# Allegro board CARLA_PCB_MK5.brd
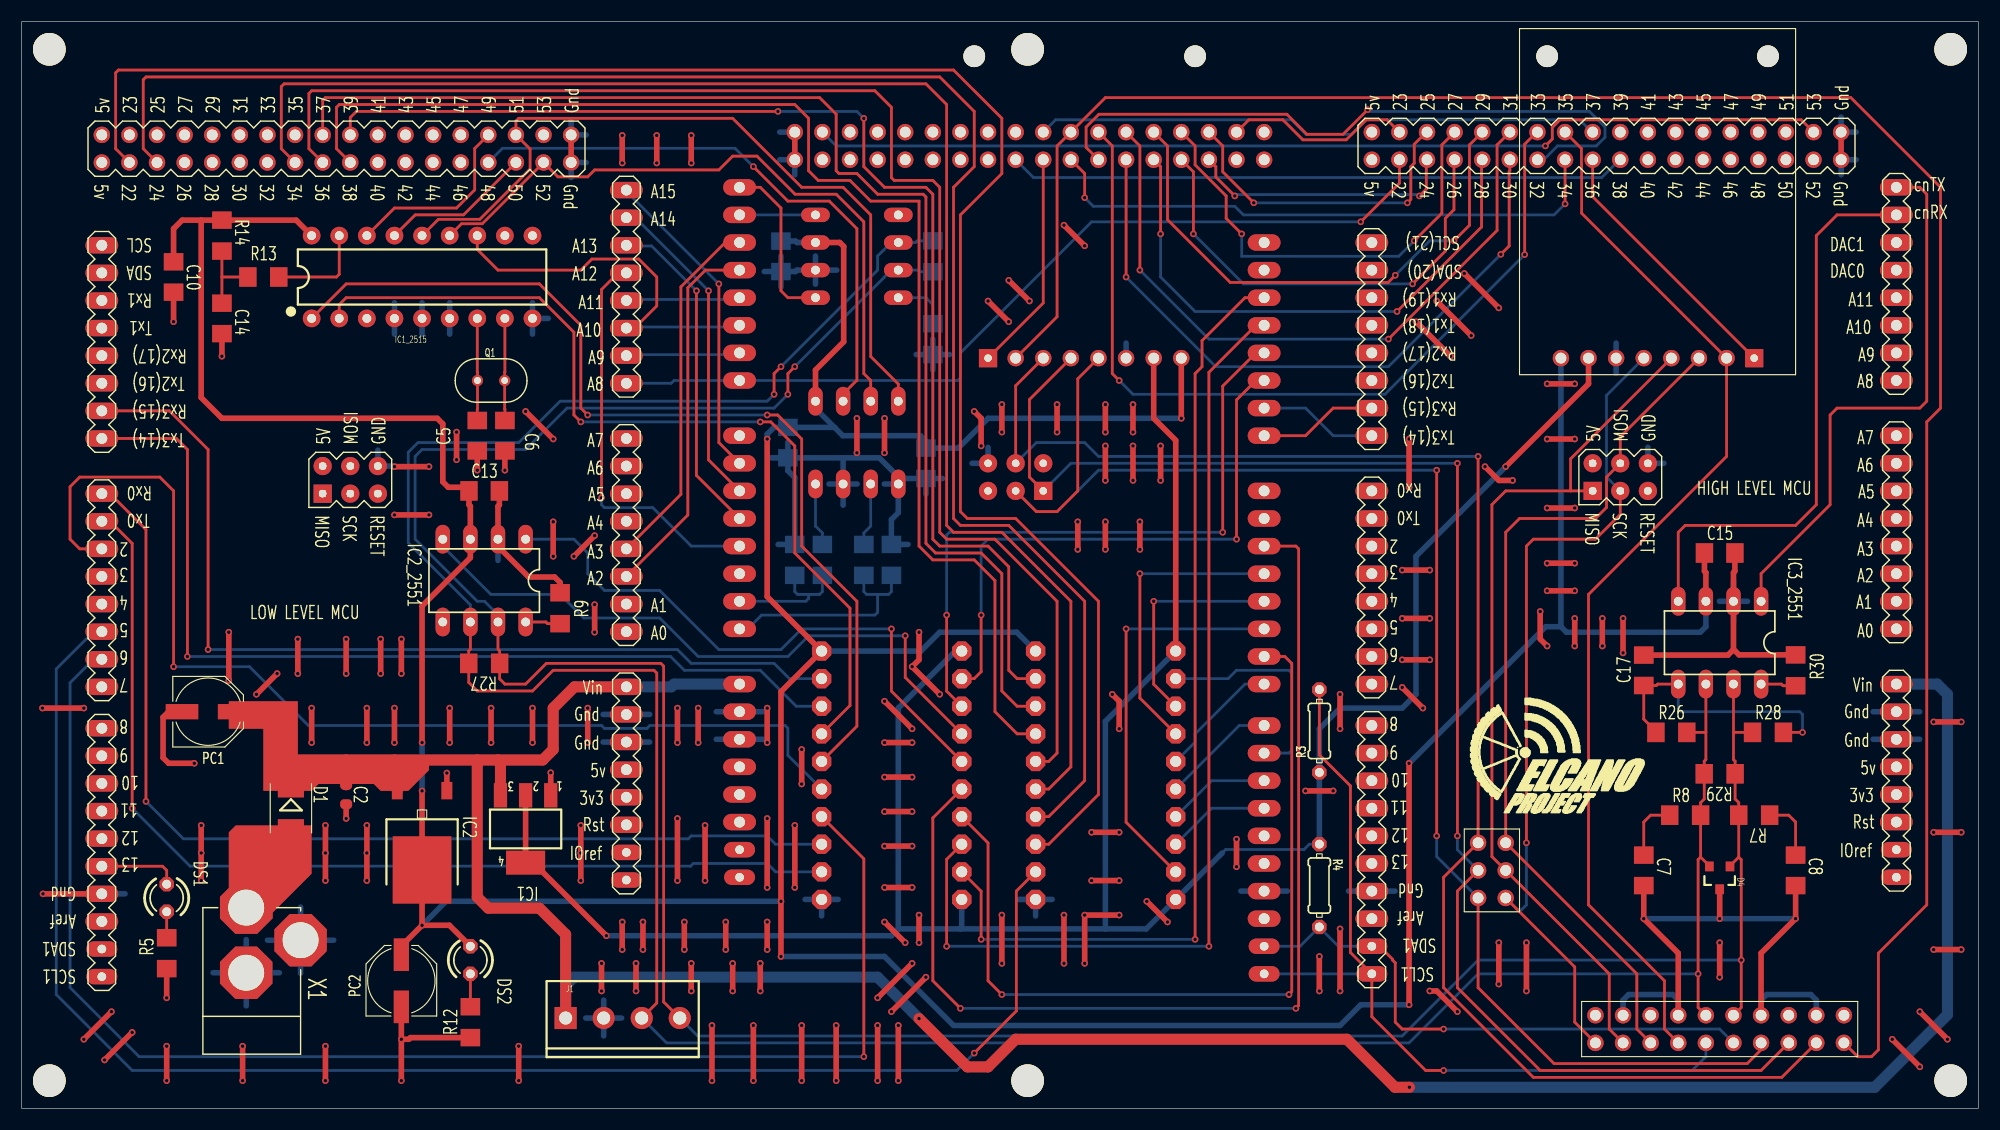
[diagram p0: board, top side]
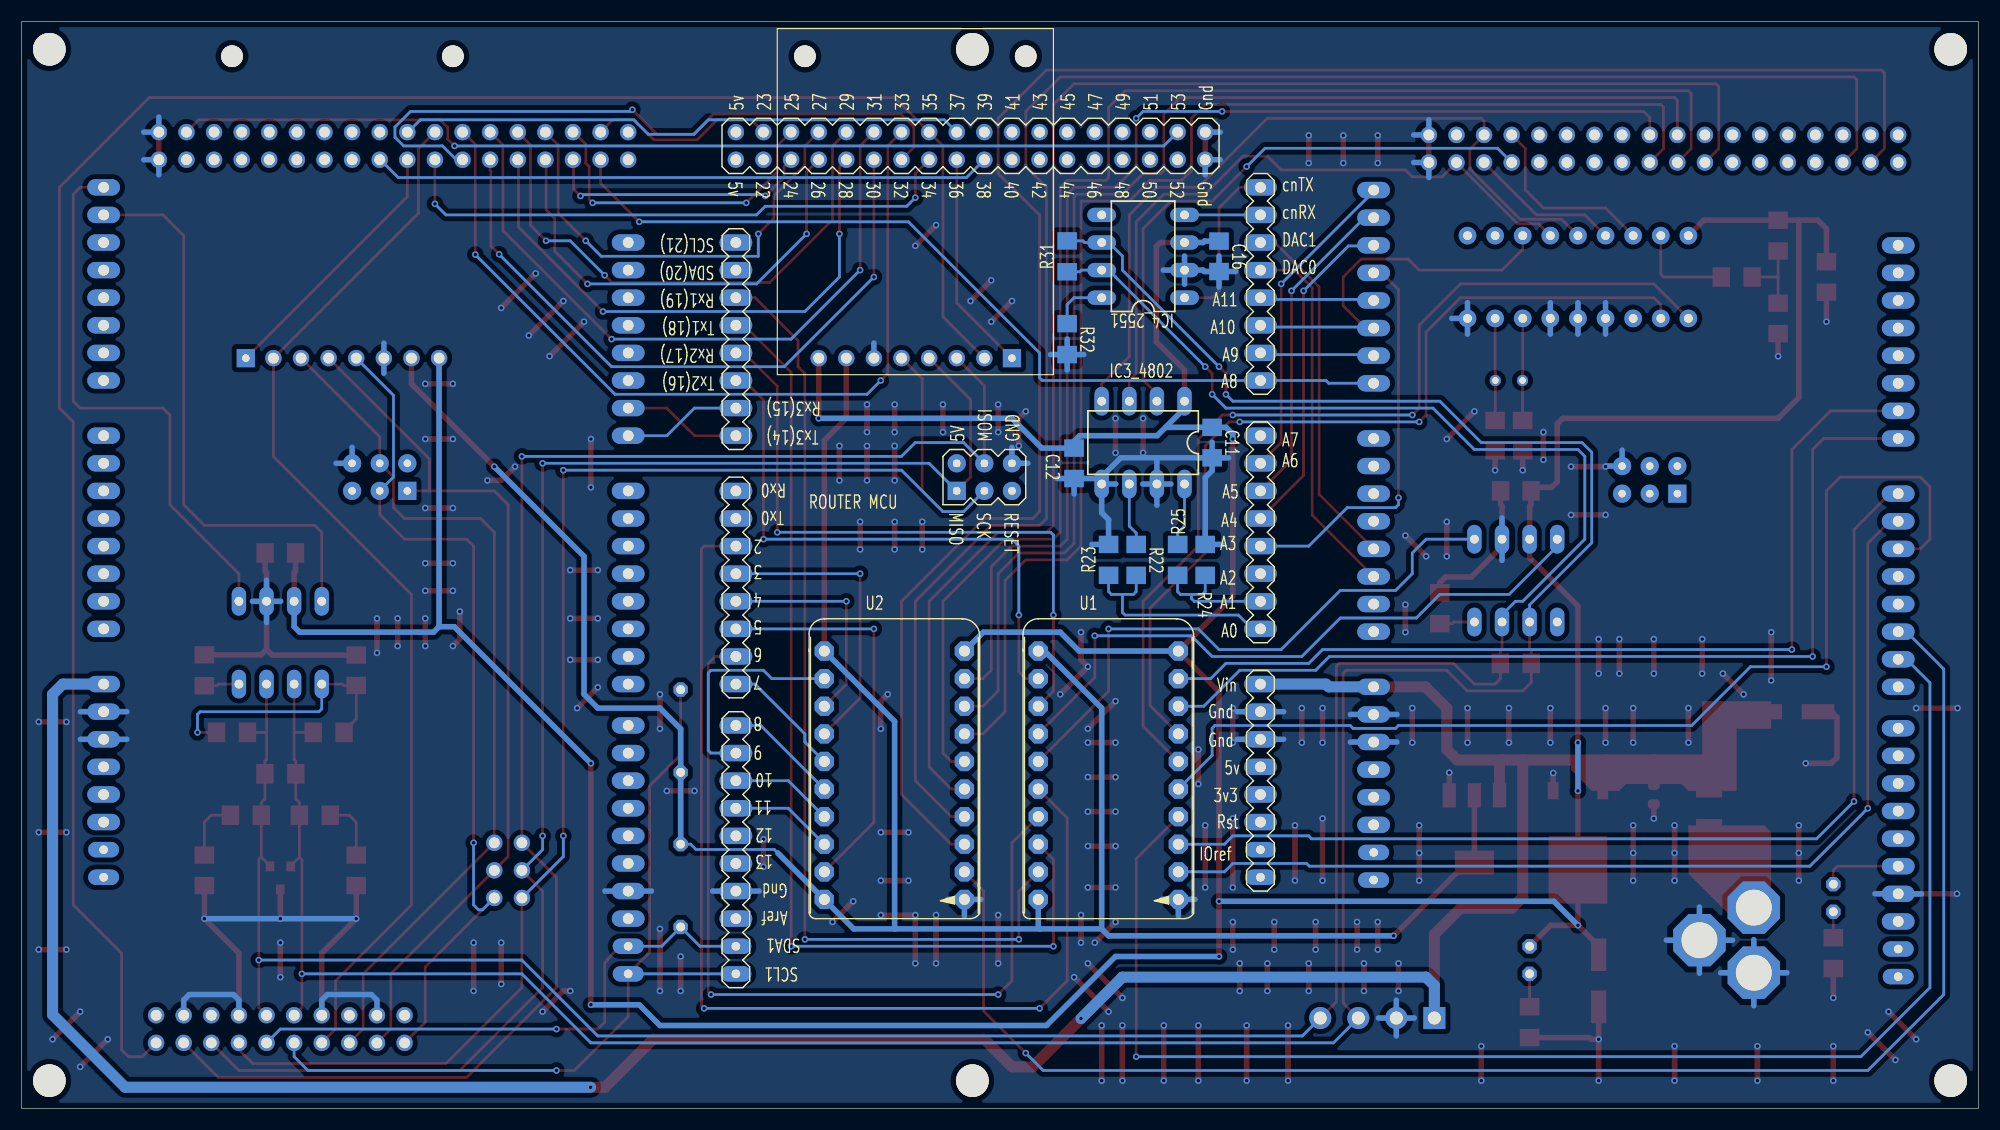
[diagram p1: board, bottom side, seen from below]

Outline 180 x 100 mm; copper layers: TOP, BOTTOM. Coordinates in mm from the lower left corner of the outline.
Outline path: 0,100 0,0 180,0 180,100 0,100

## Design rules (mm)
constraint set DEFAULT: min track width 0.254
net group OSCILLATOR: nets OSC1 OSC2
net group SPI_SIGNALS: nets CAN_SS DAC_SS
net group POWER: nets 12V0
nets with their own width: min track width 0.254; nets BRAKE_ON BRAKE_PWM BUZZER CAN_INT CAN_RXD CAN_TXD CANH CANL CS_C5_FRONT CS_C5_REAR CS_GYRO CS_MOUSE D_36 DACA DACB DEBUG_LED DRDY_C DRDY_G EBIKECONTRL EN ESTOP_INT FIX FWDSW GPS_RX GPS_TX HALLPHASEA HALLPHASEB HALLPHASEC I1 I2 INT1 L_SENSE LED LL_SCK MISO MOSI N00469 N35866 N35982 N35986 NPD PPS R_BRAKE_ON R_BRAKE_PWM R_BUZZER R_D_36 R_DACA R_DACB R_FWDSW R_REGEN_ACTIVE R_REVERSE R_RX1 R_RX3 R_SENSE R_STEER_PWM R_TX1 R_TX3 R_VOLTAGE_SWITCH R_WATCHDOG REGEN_ACTIVE REVERSE RS RX0 RX3 SCL1 SDA1 SPEEDOMETER SPI_SS STEER_SERVO_PWM TX0 TX3 VOLTAGE_SWITCH WATCHDOG WHEELROTATION

## Placement (name value [footprint] x y rotation side)
C2  100n  [C0603-ROUND]  29.84 28.88 270 top
C5  33pF  [C1206]  41.91 61.9 270 top
C6  33pF  [C1206]  44.45 61.9 270 top
C7  560pF  [C1206]  149.22 21.89 270 top
C8  560pF  [C1206]  163.19 21.89 270 top
C10  0.1uF  [C1206]  13.97 76.5 270 top
C11  0.1uF  [C1206]  70.48 61.27 270 bottom
C12  0.1uF  [C1206]  83.19 59.36 270 bottom
C13  0.1uF  [C1206]  42.55 56.82 0 top
C14  0.1uF  [C1206]  18.41 72.69 270 top
C15  0.1uF  [C1206]  156.21 51.1 0 top
C16  0.1uF  [C1206]  69.85 78.41 270 bottom
C17  4700pF  [C1206]  149.22 40.31 90 top
D1  M7  [SMB]  24.77 27.61 270 top
D4  PESD1CAN  [SPARKFUN-DISCRETESEMI_SOT23-3]  156.21 21.26 180 top
DS1  N_A  [LED3MM]  13.34 19.36 270 top
DS2  N_A  [LED3MM]  41.27 13.64 270 top
HIGH LEVEL MCU  -  [DUE_NORMAL_]  154.69 68.25 90 top
IC1  MC33269ST-3.3T3G  [SOT223]  46.35 25.7 180 top
IC1_2515  MCP2515  [DIP18]  36.83 76.5 0 top
IC2  MC33269DT-5.0G  [DPACK]  36.83 24.43 180 top
IC2_2551  MCP2551DIL08  [IC-PACKAGE_DIL08]  42.55 48.56 180 top
IC3_2551  MCP2551DIL08  [IC-PACKAGE_DIL08]  156.21 42.85 180 top
IC3_4802  MCP4802  [DIL08]  76.83 61.27 0 bottom
IC4_2551  MCP2551DIL08  [IC-PACKAGE_DIL08]  76.83 78.41 90 bottom
J1  N_A  [SCREWTERMINAL-3_5MM-4]  50.04 8.31 0 top
J2  PicoScope  [HDR-2X10]  156.21 7.29 90 top
JP2  PINHD-2X3  [HDR-2X3]  135.25 21.89 0 top
LOW LEVEL MCU  ADUMEGA2560  [MEGA2560]  37.85 68 90 top
NOREF  -  [unnamed]  2.54 2.54 0 top
NOREF#2  -  [unnamed]  177.46 2.54 0 top
NOREF#3  -  [unnamed]  2.54 97.46 0 top
NOREF#4  -  [unnamed]  92.54 2.54 0 top
NOREF#5  -  [unnamed]  177.46 97.46 0 top
NOREF#6  -  [unnamed]  92.54 97.46 0 top
PC1  47u  [PANASONIC_D]  17.14 36.5 0 top
PC2  47u  [PANASONIC_D]  34.92 11.73 90 top
Q1  16MHz  [XTAL_ECS-160-20-46X]  43.18 66.98 0 top
R3  4.7 k  [0204_7]  119.38 34.72 90 top
R4  4.7 k  [0204_7]  119.38 20.5 270 top
R5  1K  [R1206]  13.34 14.28 90 top
R7  100  [R1206]  159.38 26.98 180 top
R8  100  [R1206]  153.03 26.98 0 top
R9  4.7K  [R1206]  49.53 46.02 90 top
R12  1K  [R1206]  41.27 7.92 90 top
R13  1K  [R1206]  22.23 76.5 180 top
R14  20K  [R1206]  18.41 80.31 270 top
R22  2.2K  [R1206]  77.47 50.47 270 bottom
R23  3.3K  [R1206]  80.01 50.47 90 bottom
R24  2.2K  [R1206]  73.66 50.47 270 bottom
R25  3.3K  [R1206]  71.12 50.47 90 bottom
R26  60  [R1206]  151.76 34.59 0 top
R27  120  [R1206]  42.55 40.95 180 top
R28  60  [R1206]  160.66 34.59 0 top
R29  120  [R1206]  156.21 30.79 180 top
R30  4.7K  [R1206]  163.19 40.31 90 top
R31  120  [R1206]  83.82 78.41 90 bottom
R32  4.7K  [R1206]  83.82 70.79 270 bottom
ROUTER MCU  -  [DUE_NORMAL_]  83.82 68.25 90 bottom
SD1  Micro-SD-Breakout  [ADA-MICROSD]  150.5 99.36 270 top
SD2  Micro-SD-Breakout  [ADA-MICROSD]  97.79 99.36 270 bottom
U1  LLSHIFTER  [ELSHIFTER]  81.28 17.45 180 bottom
U2  LLSHIFTER  [ELSHIFTER]  100.97 17.45 180 bottom
X1  DC21MMX  [DC-21MM]  20.57 12.12 180 top

## Library data of the parts
C2 = C-EU_0603-RND
C5-C8 C10-C17 = C-US_C1206
D1 = DIODE-_SMB_0
D4 = PESD1CAN
DS1 DS2 = LED_3MM
HIGH LEVEL MCU ROUTER MCU = DUEPNORMALF_1
IC1 = MC33269STJ_1
IC1_2515 = MCP2515PMCP2510F_P_0
IC2 = MC33269KJ_D_1
IC2_2551 IC3_2551 IC4_2551 = MCP2551_DIL08_0
IC3_4802 = DIL8
J1 = CONN_04_SCREW_0
J2 = Header-2x10_2
JP2 = PINHD-2X3_0
LOW LEVEL MCU = ADUMEGA2560_4
PC1 PC2 = CPOL-EU_D_1
Q1 = ECS-160-20-46X
R3 R4 = R-US__0204B7
R5 R7-R9 R12-R14 R22-R32 = R-US__R1206
SD1 SD2 = Micro-SD-Breakout
U1 U2 = ELSHIFTER
X1 = DC21MM_0

## Footprints (pads in the part's own frame, mm; a bottom-side part is the same pattern mirrored in y, then rotated)
0204_7
  rrect 1.321x1.321 hole 0.813: 1(-3.81,0) 2(3.81,0)
ADA-MICROSD
  round 2 hole 2 unplated: (2.54,10.16) (2.54,-10.16)
  rect 1.676x1.676 hole 0.7: 1(30.326,8.89)
  round 1.508 hole 1: 2(30.326,6.35) 3(30.326,3.81) 4(30.326,1.27) 5(30.326,-1.27) 6(30.326,-3.81) 7(30.326,-6.35) 8(30.326,-8.89)
C0603-ROUND
  custom 0.898x1.1 smd: 1(-0.889,0) 2(0.889,0)
C1206
  rect 1.6x1.8 smd: 1(-1.4,0) 2(1.4,0)
DC-21MM
  rrect 4.826x4.826 hole 3.302: 1(-5.08,-3.353) 2(-0.076,-6.35) 3(-0.076,-0.356)
DIL08
  oval 1.321x2.642 hole 0.813: 1(-3.81,-3.81) 2(-1.27,-3.81) 3(1.27,-3.81) 4(3.81,-3.81) 5(3.81,3.81) 6(1.27,3.81) 7(-1.27,3.81) 8(-3.81,3.81)
DIP18
  round 1.626 hole 0.813: 1(-10.16,-3.81) 2(-7.62,-3.81) 3(-5.08,-3.81) 4(-2.54,-3.81) 5(0,-3.81) 6(2.54,-3.81) 7(5.08,-3.81) 8(7.62,-3.81) 9(10.16,-3.81) 10(10.16,3.81) 11(7.62,3.81) 12(5.08,3.81) 13(2.54,3.81) 14(0,3.81) 15(-2.54,3.81) 16(-5.08,3.81) 17(-7.62,3.81) 18(-10.16,3.81)
DPACK
  rect 1x1.6 smd: 1(-2.28,-4.8) 3(2.28,-4.8)
  rect 5.4x6.2 smd: 2(0,2.5)
DUE_NORMAL_
  oval 1.508x3.016 hole 1: 2(-16.51,30.48) 3(-19.05,30.48) 3V3(-39.37,-17.78) 4(-21.59,30.48) 5(-24.13,30.48) 5V(-36.83,-17.78) 6(-26.67,30.48) 7(-29.21,30.48) 8(-33.02,30.48) 9(-35.56,30.48) 10(-38.1,30.48) 11(-40.64,30.48) 12(-43.18,30.48) 13(-45.72,30.48) A0(-24.13,-17.78) A1(-21.59,-17.78) A2(-19.05,-17.78) A3(-16.51,-17.78) A4(-13.97,-17.78) A5(-11.43,-17.78) A6(-8.89,-17.78) A7(-6.35,-17.78) A8(-1.27,-17.78) A9(1.27,-17.78) A10(3.81,-17.78) A11(6.35,-17.78) AREF(-50.8,30.48) CANRX(13.97,-17.78) CANTX(16.51,-17.78) DAC0(8.89,-17.78) DAC1(11.43,-17.78) GND1(-48.26,30.48) GND_1(-34.29,-17.78) GND_2(-31.75,-17.78) RESET(-41.91,-17.78) RX0(-11.43,30.48) RX1(6.35,30.48) RX2(1.27,30.48) RX3(-3.81,30.48) SCL(11.43,30.48) SDA(8.89,30.48) TX0(-13.97,30.48) TX1(3.81,30.48) TX2(-1.27,30.48) TX3(-6.35,30.48) VIN(-29.21,-17.78)
  round 1.508 hole 1: 5V_A(19.05,30.48) 5V_B(21.59,30.48) 22(19.05,27.94) 23(21.59,27.94) 24(19.05,25.4) 25(21.59,25.4) 26(19.05,22.86) 27(21.59,22.86) 28(19.05,20.32) 29(21.59,20.32) 30(19.05,17.78) 31(21.59,17.78) 32(19.05,15.24) 33(21.59,15.24) 34(19.05,12.7) 35(21.59,12.7) 36(19.05,10.16) 37(21.59,10.16) 38(19.05,7.62) 39(21.59,7.62) 40(19.05,5.08) 41(21.59,5.08) 42(19.05,2.54) 43(21.59,2.54) 44(19.05,0) 45(21.59,0) 46(19.05,-2.54) 47(21.59,-2.54) 48(19.05,-5.08) 49(21.59,-5.08) 50(19.05,-7.62) 51(21.59,-7.62) 52(19.05,-10.16) 53(21.59,-10.16) GND_A(19.05,-12.7) GND_B(21.59,-12.7)
  round 1.676 hole 0.7: 5V_ICSP(-8.89,10.16) GND_ICSP(-8.89,5.08) MOSI_ICSP(-8.89,7.62) RESET_ICSP(-11.43,5.08) SCK_ICSP(-11.43,7.62)
  oval 1.422x2.845 hole 0.8: IOREF(-44.45,-17.78) NC(-46.99,-17.78) SCL1(-55.88,30.48) SDA1(-53.34,30.48)
  rect 1.676x1.676 hole 0.7: MISO_ICSP(-11.43,10.16)
ELSHIFTER
  rrect 1.778x1.778 hole 1.016: 1(-5.2,24.63) 2(-5.2,22.09) 3(-5.2,19.55) 4(-5.2,17.01) 5(-5.2,14.47) 6(-5.2,11.93) 7(-5.2,9.39) 8(-5.2,6.85) 9(-5.2,4.31) 10(-5.2,1.77) 11(7.69,24.63) 12(7.69,22.09) 13(7.69,19.55) 14(7.69,17.01) 15(7.69,14.47) 16(7.69,11.93) 17(7.69,9.39) 18(7.69,6.85) 19(7.69,4.31) 20(7.69,1.77)
HDR-2X3
  round 1.508 hole 1: 1(-1.27,2.54) 2(1.27,2.54) 3(-1.27,0) 4(1.27,0) 5(-1.27,-2.54) 6(1.27,-2.54)
HDR-2X10
  round 1.508 hole 1: 1(-1.27,11.43) 2(1.27,11.43) 3(-1.27,8.89) 4(1.27,8.89) 5(-1.27,6.35) 6(1.27,6.35) 7(-1.27,3.81) 8(1.27,3.81) 9(-1.27,1.27) 10(1.27,1.27) 11(-1.27,-1.27) 12(1.27,-1.27) 13(-1.27,-3.81) 14(1.27,-3.81) 15(-1.27,-6.35) 16(1.27,-6.35) 17(-1.27,-8.89) 18(1.27,-8.89) 19(-1.27,-11.43) 20(1.27,-11.43)
IC-PACKAGE_DIL08
  oval 1.321x2.642 hole 0.813: 1(-3.81,-3.81) 2(-1.27,-3.81) 3(1.27,-3.81) 4(3.81,-3.81) 5(3.81,3.81) 6(1.27,3.81) 7(-1.27,3.81) 8(-3.81,3.81)
LED3MM
  rrect 1.321x1.321 hole 0.813: A(-1.27,0) K(1.27,0)
MEGA2560
  oval 1.508x3.016 hole 1: 2(-16.51,30.48) 3(-19.05,30.48) 3V3(-39.37,-17.78) 4(-21.59,30.48) 5(-24.13,30.48) 5V_1(-36.83,-17.78) 6(-26.67,30.48) 7(-29.21,30.48) 8(-33.02,30.48) 9(-35.56,30.48) 10(-38.1,30.48) 11(-40.64,30.48) 12(-43.18,30.48) 13(-45.72,30.48) 20(8.89,30.48) 21(11.43,30.48) A0(-24.13,-17.78) A1(-21.59,-17.78) A2(-19.05,-17.78) A3(-16.51,-17.78) A4(-13.97,-17.78) A5(-11.43,-17.78) A6(-8.89,-17.78) A7(-6.35,-17.78) A8(-1.27,-17.78) A9(1.27,-17.78) A10(3.81,-17.78) A11(6.35,-17.78) A12(8.89,-17.78) A13(11.43,-17.78) A14(13.97,-17.78) A15(16.51,-17.78) AREF(-50.8,30.48) GND_1(-34.29,-17.78) GND_2(-31.75,-17.78) GND_5(-48.26,30.48) RESET(-41.91,-17.78) RX0(-11.43,30.48) RX1(6.35,30.48) RX2(1.27,30.48) RX3(-3.81,30.48) TX0(-13.97,30.48) TX1(3.81,30.48) TX2(-1.27,30.48) TX3(-6.35,30.48) VIN(-29.21,-17.78)
  round 1.508 hole 1: 5V_2(19.05,30.48) 5V_3(21.59,30.48) 22(19.05,27.94) 23(21.59,27.94) 24(19.05,25.4) 25(21.59,25.4) 26(19.05,22.86) 27(21.59,22.86) 28(19.05,20.32) 29(21.59,20.32) 30(19.05,17.78) 31(21.59,17.78) 32(19.05,15.24) 33(21.59,15.24) 34(19.05,12.7) 35(21.59,12.7) 36(19.05,10.16) 37(21.59,10.16) 38(19.05,7.62) 39(21.59,7.62) 40(19.05,5.08) 41(21.59,5.08) 42(19.05,2.54) 43(21.59,2.54) 44(19.05,0) 45(21.59,0) 46(19.05,-2.54) 47(21.59,-2.54) 48(19.05,-5.08) 49(21.59,-5.08) 50(19.05,-7.62) 51(21.59,-7.62) 52(19.05,-10.16) 53(21.59,-10.16) GND_3(19.05,-12.7) GND_4(21.59,-12.7)
  round 1.676 hole 0.7: 5V_ICSP(-8.89,10.16) GND_ICSP(-8.89,5.08) MOSI_ICSP(-8.89,7.62) RESET_ICSP(-11.43,5.08) SCK_ICSP(-11.43,7.62)
  oval 1.422x2.845 hole 0.8: IOREF(-44.45,-17.78) NC(-46.99,-17.78) SCL(-55.88,30.48) SDA(-53.34,30.48)
  rect 1.676x1.676 hole 0.7: MISO_ICSP(-11.43,10.16)
PANASONIC_D
  rect 3x1.4 smd: +(2.4,0) -(-2.4,0)
R1206
  rect 1.6x1.8 smd: 1(-1.422,0) 2(1.422,0)
SCREWTERMINAL-3_5MM-4
  rect 2.032x2.032 hole 1.2: 1(0,0)
  round 2.032 hole 1.2: 2(3.5,0) 3(7,0) 4(10.5,0)
SMB
  rect 2.4x2.4 smd: A(2.2,0) C(-2.2,0)
SOT223
  rect 1.219x2.235 smd: 1(-2.311,-3.099) 2(0,-3.099) 3(2.311,-3.099)
  rect 3.6x2.2 smd: 4(0,3.099)
SPARKFUN-DISCRETESEMI_SOT23-3
  rect 0.8x0.9 smd: 1(-0.95,-1) 2(0.95,-1) 3(0,1.1)
unnamed
  round 3 hole 3 unplated: (0,0)
XTAL_ECS-160-20-46X
  round 1.03 hole 0.63: 1(-1.25,0) 2(1.25,0)

## Nets
3V3: IC1.2(VOUT2) IC1.4 R3.1 R4.1 SD1.7 SD2.7 U1.1 U1.10 U2.1 U2.10
5V0: C10.1 C11.1 C12.1 C13.1 C15.1 C16.1 DS2.A IC1_2515.18 IC2.2(VOUT) IC2_2551.3 IC3_2551.3 IC3_4802.1 IC4_2551.3 PC2.+ R14.1 SD1.8 SD2.8 U1.11(VCCB) U2.11(VCCB)
12V0: C2.1 D1.C HIGH LEVEL MCU.VIN IC1.3 IC2.3 J1.1 LOW LEVEL MCU.VIN PC1.+ ROUTER MCU.VIN
GND: C2.2 C5.2 C6.2 C7.2 C8.2 C10.2 C11.2 C12.2 C13.2 C14.2 C15.2 C16.2 C17.2 D4.3 HIGH LEVEL MCU.GND1 HIGH LEVEL MCU.GND_1 HIGH LEVEL MCU.GND_2 HIGH LEVEL MCU.GND_A HIGH LEVEL MCU.GND_B HIGH LEVEL MCU.GND_ICSP IC1.1 IC1_2515.4 IC1_2515.5 IC1_2515.6 IC1_2515.9(VSS) IC2.1 IC2_2551.2(VSS) IC3_2551.2(VSS) IC3_4802.5 IC3_4802.7 IC4_2551.2(VSS) J1.2 J2.4 J2.8 J2.14 J2.18(GND4) LOW LEVEL MCU.GND_1 LOW LEVEL MCU.GND_2 LOW LEVEL MCU.GND_3 LOW LEVEL MCU.GND_4 LOW LEVEL MCU.GND_5 LOW LEVEL MCU.GND_ICSP PC1.- PC2.- R5.1 R9.2 R12.1 R23.2 R25.2 R30.2 R32.2 ROUTER MCU.GND1 ROUTER MCU.GND_1 ROUTER MCU.GND_2 ROUTER MCU.GND_A ROUTER MCU.GND_B ROUTER MCU.GND_ICSP SD1.6(GND) SD2.6(GND) U1.20 U2.20 X1.1 X1.3
BRAKE_ON: LOW LEVEL MCU.39 U2.12
BRAKE_PWM: LOW LEVEL MCU.2 U1.16
BUZZER: LOW LEVEL MCU.38 U2.14
CAN_INT: IC1_2515.12 LOW LEVEL MCU.A10 ROUTER MCU.A10
CAN_RXD: IC1_2515.2 U1.14
CAN_SS: IC1_2515.16 LOW LEVEL MCU.49
CAN_TXD: IC1_2515.1 U1.15
CAN_VREF: C17.1 IC3_2551.5 R26.1 R28.2
CANH: D4.1 IC2_2551.7 IC3_2551.7 IC4_2551.7 J1.4 J2.12 R7.2 R27.1 R28.1 R29.1 R31.1
CANL: D4.2 IC2_2551.6 IC3_2551.6 IC4_2551.6 J1.3 J2.10 R8.2 R26.2 R27.2 R29.2 R31.2
CD_HL: HIGH LEVEL MCU.36 SD1.1
CD_ROUTER: ROUTER MCU.36 SD2.1
CS_C5_FRONT: HIGH LEVEL MCU.37 ROUTER MCU.37
CS_C5_REAR: HIGH LEVEL MCU.38 ROUTER MCU.38
CS_GYRO: HIGH LEVEL MCU.25 ROUTER MCU.25
CS_MOUSE: HIGH LEVEL MCU.32 ROUTER MCU.32
CS_SD_HL: HIGH LEVEL MCU.35 J2.7 SD1.2
CS_SD_ROUTER: J2.19 ROUTER MCU.35 SD2.2
D_36: LOW LEVEL MCU.36 U2.15
DAC_SS: IC3_4802.2 LOW LEVEL MCU.48
DACA: IC3_4802.8 R24.1
DACB: IC3_4802.6 R22.1
DEBUG_LED: DS1.A LOW LEVEL MCU.13
DRDY_C: HIGH LEVEL MCU.26 ROUTER MCU.26
DRDY_G: HIGH LEVEL MCU.24 ROUTER MCU.24
EBIKECONTRL: LOW LEVEL MCU.A13 ROUTER MCU.A4
EN: HIGH LEVEL MCU.31 ROUTER MCU.31
ESTOP_INT: LOW LEVEL MCU.A9 ROUTER MCU.A9
FIX: HIGH LEVEL MCU.30 ROUTER MCU.30
FWDSW: LOW LEVEL MCU.34 U2.16
GPS_RX: HIGH LEVEL MCU.TX3 ROUTER MCU.RX3
GPS_TX: HIGH LEVEL MCU.RX3 ROUTER MCU.TX3
HALLPHASEA: LOW LEVEL MCU.A15 ROUTER MCU.A6
HALLPHASEB: LOW LEVEL MCU.A14 ROUTER MCU.A5
HALLPHASEC: LOW LEVEL MCU.A12 ROUTER MCU.A3
HL-CANRX: HIGH LEVEL MCU.CANRX IC3_2551.4
HL-CANTX: HIGH LEVEL MCU.CANTX IC3_2551.1
I1: HIGH LEVEL MCU.27 ROUTER MCU.27
I2: HIGH LEVEL MCU.28 ROUTER MCU.28
INT1: HIGH LEVEL MCU.23 ROUTER MCU.23
L_SENSE: LOW LEVEL MCU.A2 ROUTER MCU.DAC0
LED: HIGH LEVEL MCU.34 ROUTER MCU.34
LL-CANRX: IC2_2551.4 U1.4
LL-CANTX: IC2_2551.1 U1.5
LL_SCK: IC1_2515.13 IC3_4802.3 LOW LEVEL MCU.52
MISO: IC1_2515.15 LOW LEVEL MCU.50
MISO_HL: HIGH LEVEL MCU.MISO_ICSP J2.3 JP2.4 SD1.4
MISO_ROUTER: J2.15 JP2.3 ROUTER MCU.MISO_ICSP SD2.4
MOSI: IC1_2515.14 IC3_4802.4 LOW LEVEL MCU.51
MOSI_HL: HIGH LEVEL MCU.MOSI_ICSP J2.5 JP2.2 SD1.3
MOSI_ROUTER: J2.17 JP2.1 ROUTER MCU.MOSI_ICSP SD2.3
NPD: HIGH LEVEL MCU.33 ROUTER MCU.33
OSC1: C6.1 IC1_2515.8 Q1.2
OSC2: C5.1 IC1_2515.7 Q1.1
PPS: HIGH LEVEL MCU.29 ROUTER MCU.29
PWRIN: D1.A X1.2
R_BRAKE_ON: ROUTER MCU.9 U2.2
R_BRAKE_PWM: ROUTER MCU.2 U1.6
R_BUZZER: ROUTER MCU.3 U2.4
R_D_36: ROUTER MCU.7 U2.5
R_DACA: R24.2 R25.1 ROUTER MCU.A1
R_DACB: R22.2 R23.1 ROUTER MCU.A0
R_FWDSW: ROUTER MCU.8 U2.6
R_REGEN_ACTIVE: ROUTER MCU.11 U2.8
R_REVERSE: ROUTER MCU.10 U2.7
R_RX1: ROUTER MCU.RX1 U1.9
R_RX3: ROUTER MCU.RX2 U1.3
R_SENSE: LOW LEVEL MCU.A3 ROUTER MCU.DAC1
R_STEER_PWM: ROUTER MCU.6 U1.7
R_TX1: ROUTER MCU.TX1 U1.8
R_TX3: ROUTER MCU.TX2 U1.2
R_VOLTAGE_SWITCH: ROUTER MCU.4 U2.3
R_WATCHDOG: ROUTER MCU.5 U2.9
REGEN_ACTIVE: LOW LEVEL MCU.22 U2.18
REVERSE: LOW LEVEL MCU.24 U2.17
RS: IC1_2515.17 R13.1
RT-CANRX: IC4_2551.4 ROUTER MCU.CANRX
RT-CANTX: IC4_2551.1 ROUTER MCU.CANTX
RX0: LOW LEVEL MCU.RX0 U1.18
RX3: LOW LEVEL MCU.RX3 U1.12
SCK_HL: HIGH LEVEL MCU.SCK_ICSP J2.1 JP2.6 SD1.5
SCK_ROUTER: J2.13 JP2.5 ROUTER MCU.SCK_ICSP SD2.5
SCL1: HIGH LEVEL MCU.SCL1 J2.9 R3.2 ROUTER MCU.SCL1
SDA1: HIGH LEVEL MCU.SDA1 J2.11 R4.2 ROUTER MCU.SDA1
SPEEDOMETER: LOW LEVEL MCU.A11 ROUTER MCU.A11
SPI_SS: HIGH LEVEL MCU.53 ROUTER MCU.53
STEER_SERVO_PWM: LOW LEVEL MCU.6 U1.17
TX0: LOW LEVEL MCU.TX0 U1.19
TX3: LOW LEVEL MCU.TX3 U1.13
VOLTAGE_SWITCH: LOW LEVEL MCU.37 U2.13
WATCHDOG: LOW LEVEL MCU.5 U2.19
WHEELROTATION: HIGH LEVEL MCU.22 LOW LEVEL MCU.A8 ROUTER MCU.A8
N00469: C14.1 R13.2 R14.2
N00471: DS2.K(C) R12.2
N00472: DS1.K(C) R5.2
N35866: IC2_2551.8 R9.1
N35982: C8.1 R7.1
N35986: C7.1 R8.1
N38622: IC3_2551.8 R30.1
N38835: IC4_2551.8 R32.1

Pads without a net: HIGH LEVEL MCU 2 3 3V3 4 5 5V 5V_A 5V_B 5V_ICSP 6 7 8 9 10 11 12 13 39 40 41 42 43 44 45 46 47 48 49 50 51 52 A0 A1 A2 A3 A4 A5 A6 A7 A8 A9 A10 A11 AREF DAC0 DAC1 IOREF NC RESET RESET_ICSP RX0 RX1 RX2 SCL SDA TX0 TX1 TX2; IC1_2515 3 10 11; IC2_2551 5; IC4_2551 5; J2 2 6 16 20; LOW LEVEL MCU 3 3V3 4 5V_1 5V_2 5V_3 5V_ICSP 7 8 9 10 11 12 20 21 23 25 26 27 28 29 30 31 32 33 35 40 41 42 43 44 45 46 47 53 A0 A1 A4 A5 A6 A7 AREF IOREF MISO_ICSP MOSI_ICSP NC RESET RESET_ICSP RX1 RX2 SCK_ICSP SCL SDA TX1 TX2; ROUTER MCU 3V3 5V 5V_A 5V_B 5V_ICSP 12 13 22 39 40 41 42 43 44 45 46 47 48 49 50 51 52 A2 A7 AREF IOREF NC RESET RESET_ICSP RX0 SCL SDA TX0

## Via types
v1: diameter 0.61, hole 0.33, TOP to BOTTOM, 355 vias

## Routing (per net, layer and track width the routed paths; a pad name or vN(x,y) marks a point on that pad's centre or on a via; arc(x,y) is an arc through that point)
3V3: length 231
  TOP w0.508: 104.14,69.04 104.14,63.5 106.17,61.48 U2.1 ; v1(53.79,15.88) 47.05,22.61 IC1.4 IC1.2 ; v1(136.52,59.05) 144.15,66.67 144.15,69.04
  BOTTOM w0.254: 110.44,23.5 110.76,23.82 117.97,23.82 118.47,24.31 R4.1
  BOTTOM w0.508: 99.69,16.51 86.36,16.51 ; 99.69,16.51 103.45,16.51 U2.10 110.44,23.5 ; 99.69,16.51 99.69,35.61 U2.1 ; 86.36,16.51 80.64,16.51 ; 86.36,16.51 86.48,16.63 U1.10 ; R4.1 R3.1 119.38,34.92 121.28,36.83 127,36.83 128.27,38.1 128.27,50.8 v1(136.52,59.05) ; v1(53.79,15.88) 80.01,15.88 80.64,16.51 ; 80.64,16.51 80.64,36.83 85.89,42.08 U1.1
5V0: length 440.2
  TOP w0.508: v1(106.68,63.5) 106.68,69.04 ; IC4_2551.3 75.26,79.68 75.62,79.32 75.62,70.54 73.03,67.94 IC3_4802.1 ; C10.1 13.97,80.95 14.76,81.74 16.51,81.74 ; v1(69.85,13.97) v1(69.85,19.05) 69.85,38.34 U1.11 68.58,47.09 v1(68.58,61.59) ; v1(36.83,16.84) IC2.2 v1(36.83,29.21) ; v1(36.83,16.84) 34.92,14.94 PC2.+ ; v1(36.83,16.84) 39.34,16.84 DS2.A ; 16.51,81.74 16.51,65.41 18.41,63.5 38.23,63.5 38.73,62.99 38.73,57.66 39.24,57.15 40.81,57.15 C13.1 41.15,55.54 41.27,55.41 IC2_2551.3 41.27,50.67 36.83,46.23 v1(36.83,33.66) ; 16.51,81.74 R14.1 25.25,81.74 IC1_2515.18 ; C15.1 154.81,49.43 154.94,49.3 IC3_2551.3 ; v1(127.64,31.75) v1(127.64,9.53)
  BOTTOM w0.508: IC4_2551.3 71.32,79.68 71.19,79.81 C16.1 ; v1(127.64,31.75) 140.21,44.32 141.6,44.32 ; 74.77,62.66 75.54,61.9 82.68,61.9 83.19,61.39 C12.1 86.16,60.76 88.9,63.5 v1(106.68,63.5) ; 74.77,62.66 73.03,64.41 IC3_4802.1 ; 74.77,62.66 C11.1 69.2,62.66 68.58,62.04 v1(68.58,61.59) ; 141.6,44.32 142.11,43.81 154.43,43.81 154.94,44.32 IC3_2551.3 ; 141.6,44.32 141.6,69.04 ; U1.11 82.72,42.08 84.45,43.81 91.54,43.81 U2.11 ; v1(36.83,16.84) 39.04,19.05 v1(69.85,19.05) ; v1(127.64,9.53) 123.19,9.53 121.28,7.62 85.72,7.62 79.38,13.97 v1(69.85,13.97) ; v1(36.83,29.21) v1(36.83,33.66)
12V0: length 269.7
  TOP w1.016: 34.29,32.05 34.55,31.8 IC2.3 ; 34.29,32.05 29.84,32.05 ; 34.29,32.05 41.91,32.05 ; 41.91,32.05 41.91,19.43 42.93,18.41 47.62,18.41 50.04,16 J1.1 ; 41.91,32.05 43.81,32.05 ; 24.77,32.05 D1.C ; 24.77,32.05 24.77,34.59 22.86,36.5 PC1.+ ; 24.77,32.05 29.84,32.05 ; v1(82.55,8.26) 87,3.81 88.9,3.81 91.44,6.35 121.92,6.35 126.34,1.93 v1(127.66,1.93) ; 29.84,32.05 C2.1 ; 43.81,32.05 47.93,32.05 48.9,33.02 48.9,36.83 50.85,38.79 LOW LEVEL MCU.VIN ; 43.81,32.05 44.04,31.83 IC1.3
  BOTTOM w1.016: ROUTER MCU.VIN 60.01,39.04 59.75,38.79 LOW LEVEL MCU.VIN ; HIGH LEVEL MCU.VIN 176.22,39.04 177.16,38.1 177.16,8.61 170.48,1.93 v1(127.66,1.93) ; v1(82.55,8.26) 78.74,12.06 50.8,12.06 50.04,11.3 J1.1
GND: length 760
  TOP w0.508: v1(79.38,63.5) v1(79.38,60.33) ; v1(100.97,34.92) 100.97,37.47 v1(100.33,38.1) ; v1(121.28,38.1) v1(121.28,34.92) ; J2.14 160.02,14.28 v1(163.19,17.45) C8.2 ; v1(100.97,17.78) v1(97.79,17.78) v1(97.79,13.34) ; v1(128.91,36.83) v1(127,38.73) ; v1(78.74,10.16) v1(81.92,13.34) ; v1(20.32,5.71) v1(20.32,2.54) ; v1(55.24,17.14) v1(55.24,14.61) ; v1(99.69,53.98) v1(99.69,51.44) ; v1(56.52,13.34) v1(56.52,10.79) ; v1(40.01,59.69) v1(40.01,62.23) ; v1(64.77,17.14) v1(64.77,14.61) ; v1(15.88,31.75) 13.51,31.75 13.01,32.26 13.01,35.99 13.51,36.5 PC1.- ; v1(98.42,25.4) v1(100.97,25.4) ; C7.2 v1(149.22,17.45) 152.4,14.28 J2.8 ; C17.2 156.97,41.71 157.48,42.22 157.48,42.24 ; v1(102.23,60.96) v1(102.23,57.78) ; v1(74.93,7.62) v1(74.93,2.54) ; v1(88.27,60.96) 88.27,63.5 v1(87.63,64.14) ; v1(8.26,8.89) v1(5.71,6.35) ; v1(102.87,53.98) v1(102.87,51.44) ; 157.48,42.24 IC3_2551.2 157.48,49.3 157.61,49.43 C15.2 ; 157.48,42.24 157.99,41.73 R30.2 ; v1(175.9,35.56) v1(178.44,35.56) ; v1(97.79,79.38) v1(95.89,81.28) ; 49.53,47.45 49.53,48.39 49.02,48.9 46.63,48.9 43.81,51.71 IC2_2551.2 43.81,55.41 43.95,55.54 C13.2 ; v1(63.5,7.62) v1(63.5,2.54) ; v1(57.15,17.14) v1(57.15,14.61) ; v1(97.16,53.98) v1(97.16,51.44) ; v1(60.33,26.67) v1(60.33,20.95) ; v1(84.45,38.1) v1(81.92,40.64) 82.55,41.27 v1(82.55,43.81) ; v1(71.75,7.62) v1(71.75,2.54) ; v1(80.64,7.62) v1(80.64,2.54) ; v1(134.62,59.05) 135.89,57.78 v1(137.16,57.78) ; v1(127.64,57.15) v1(127.64,61.59) ; v1(10.16,6.99) v1(7.62,4.45) ; v1(31.75,26.04) v1(31.75,23.5) v1(31.75,20.95) ; C6.2 v1(44.45,58.73) ; C5.2 v1(41.91,58.73) ; v1(39.37,36.83) v1(39.37,33.66) ; v1(60.33,33.66) v1(60.33,36.83) ; v1(79.38,17.14) v1(81.28,15.24) ; D4.3 v1(156.21,17.45) ; v1(68.58,33.66) v1(68.58,36.83) ; v1(80.01,8.89) v1(83.19,12.06) ; v1(27.94,26.04) v1(27.94,23.5) v1(27.94,20.95) ; v1(140.34,55.24) v1(142.88,55.24) ; v1(129.54,45.09) v1(127,45.09) ; v1(27.94,5.71) v1(27.94,2.54) ; v1(92.71,74.3) v1(90.81,76.2) ; v1(140.34,61.59) v1(142.88,61.59) ; v1(99.69,62.23) v1(99.69,64.77) ; v1(34.92,6.35) 35.61,6.35 35.76,6.5 R12.1 ; v1(34.92,6.35) 34.92,9.34 ; v1(34.92,6.35) v1(34.92,2.54) ; v1(142.88,66.67) v1(140.34,66.67) ; v1(90.81,72.39) v1(88.9,74.3) ; v1(71.75,29.84) v1(71.75,33.02) ; v1(16.51,26.04) v1(16.51,23.5) v1(16.51,20.95) ; v1(34.92,40.01) v1(34.92,43.18) ; v1(5.71,36.83) v1(1.91,36.83) ; C2.2 v1(29.84,26.67) ; v1(79.38,33.66) v1(81.92,33.66) ; v1(48.9,50.8) v1(48.9,53.98) ; v1(48.67,30.89) IC1.1 ; v1(13.34,5.71) v1(13.34,2.54) ; v1(132.72,76.83) v1(135.89,73.66) ; v1(100.97,20.95) v1(98.42,20.95) ; v1(95.25,62.23) v1(95.25,64.77) ; v1(33.02,43.18) v1(33.02,40.01) ; v1(175.9,25.4) v1(178.44,25.4) ; v1(139.7,45.72) 139.7,43.18 v1(140.34,42.55) ; v1(65.41,13.34) v1(65.41,10.79) ; v1(45.72,5.71) v1(45.72,2.54) ; v1(140.34,47.62) v1(142.88,47.62) ; v1(68.58,26.67) v1(68.58,20.32) ; v1(76.83,63.5) v1(76.83,60.33) ; v1(58.42,87) v1(58.42,89.53) ; v1(129.54,49.53) v1(127,49.53) ; HIGH LEVEL MCU.GND_A HIGH LEVEL MCU.GND_B ; v1(95.89,17.78) v1(95.89,13.34) ; v1(37.47,59.05) v1(34.29,59.05) ; v1(34.29,33.66) v1(34.29,36.83) ; v1(129.54,41.27) v1(127,41.27) ; 18.41,71.3 v1(18.41,69.22) ; v1(67.31,7.62) v1(67.31,2.54) ; v1(46.99,33.66) v1(46.99,36.83) ; v1(156.21,15.24) v1(156.21,12.06) ; v1(104.78,60.96) v1(104.78,57.78) ; v1(111.76,24.77) v1(111.76,22.23) ; LOW LEVEL MCU.GND_3 LOW LEVEL MCU.GND_4 ; v1(55.24,89.53) v1(55.24,87) ; v1(147.32,45.09) v1(147.32,41.91) ; v1(79.38,20.32) v1(81.92,20.32) ; v1(61.59,89.53) v1(61.59,87) ; v1(68.58,17.14) v1(68.58,14.61) ; v1(25.4,43.18) v1(25.4,40.01) ; v1(102.23,64.77) v1(102.23,62.23) ; v1(178.44,14.61) v1(175.9,14.61) ; v1(61.59,10.79) v1(61.59,13.34) ; v1(37.47,54.61) v1(34.29,54.61) ; v1(90.17,17.78) v1(90.17,13.34) ; v1(128.27,72.39) v1(131.44,69.22) ; v1(26.67,33.66) v1(26.67,36.83) ; C10.2 v1(13.97,72.39) ; v1(60.96,17.14) v1(60.96,14.61) ; LOW LEVEL MCU.GND_5 v1(1.96,19.74) ; v1(52.07,33.66) v1(52.07,36.83) ; v1(129.54,10.79) 130.18,10.79 v1(132.08,8.89) ; R5.1 v1(13.34,10.16) ; v1(120.65,29.21) v1(118.11,29.21) ; v1(21.59,38.1) v1(23.5,40.01) ; v1(53.34,10.79) v1(53.34,13.34) ; v1(121.28,16.51) v1(121.28,10.79) ; v1(81.92,30.48) v1(79.38,30.48) ; v1(29.84,43.18) v1(29.84,40.01) ; v1(79.38,27.3) v1(81.92,27.3) ; v1(48.9,61.59) v1(46.35,64.14) ; v1(138.43,15.24) v1(138.43,10.79) ; v1(19.05,39.37) v1(19.05,43.81) ; v1(31.75,36.83) v1(31.75,33.66) ; v1(135.89,15.24) v1(135.89,11.43) ; v1(51.44,26.04) v1(51.44,23.5) v1(51.44,20.95) ; v1(130.18,74.3) v1(133.35,71.12) ; v1(172.09,6.35) v1(174.62,3.81) ; ROUTER MCU.GND_A ROUTER MCU.GND_B ; v1(62.87,26.04) v1(62.87,20.95) ; v1(52.7,46.35) v1(52.7,43.81) ; v1(50.8,50.8) v1(52.7,52.7) ; IC2.1 v1(39.11,30.86) ; v1(43.18,33.66) v1(43.18,36.83) ; v1(81.92,24.13) v1(79.38,24.13) ; v1(62.23,36.83) v1(62.23,33.66) ; v1(142.88,50.16) v1(140.34,50.16) ; v1(145.41,45.09) v1(145.41,42.55) ; v1(81.92,34.92) v1(79.38,37.47) ; v1(103.5,19.05) v1(105.41,17.14) ; v1(142.88,42.55) v1(142.88,45.09) ; v1(119.38,13.97) v1(119.38,10.79) ; v1(99.69,60.96) v1(99.69,57.78) ; v1(90.17,62.23) v1(90.17,64.77) ; v1(71.12,26.04) v1(71.12,20.32) ; v1(78.74,7.62) v1(78.74,2.54) ; v1(174.62,8.89) v1(177.16,6.35) ; v1(67.94,13.34) v1(67.94,10.79) ; v1(82.55,15.24) v1(82.55,17.78)
  BOTTOM w0.508: 57.77,36.25 LOW LEVEL MCU.GND_2 53.49,36.25 ; 51.89,8.31 J1.2 ; J1.2 53.54,9.95 ; J1.2 53.54,6.66 ; J1.2 55.19,8.31 ; 39.37,74.14 IC1_2515.6 39.37,71.25 ; 50.55,85.66 LOW LEVEL MCU.GND_3 51.93,87.05 ; 82.29,69.37 R32.2 ; R32.2 85.35,69.37 ; R32.2 83.82,70.8 ; R32.2 83.82,67.94 ; 68.18,33.96 ROUTER MCU.GND_1 63.9,33.96 ; 174.61,36.5 HIGH LEVEL MCU.GND_2 170.33,36.5 ; X1.3 20.65,15.52 ; X1.3 23.69,12.47 ; X1.3 17.61,12.47 ; X1.3 20.65,9.43 ; 34.29,71.25 IC1_2515.4 34.29,74.14 ; 51.93,89.59 LOW LEVEL MCU.GND_4 50.55,90.97 ; IC3_4802.5 81.15,57.96 C12.2 ; IC3_4802.5 79.35,57.45 ; IC3_4802.5 80.64,54.81 80.01,54.18 R23.2 81.54,51.89 ; IC3_4802.5 80.64,58.12 78.9,59.87 75.56,59.87 ; 9.51,19.74 LOW LEVEL MCU.GND_5 5.23,19.74 ; 91.75,19.22 U2.20 ; U2.20 94.8,19.22 ; U2.20 93.28,17.7 ; 88.9,60.83 ROUTER MCU.GND_ICSP 87.43,59.36 ; IC3_4802.7 75.56,59.87 ; IC3_4802.7 76.86,57.45 ; IC3_4802.7 74.27,57.45 ; IC3_4802.7 75.56,55.5 ; 75.56,59.87 C11.2 ; IC1_2515.9 46.99,74.14 ; IC1_2515.9 46.99,71.25 ; IC1_2515.9 48.43,72.69 ; 149.61,60.83 HIGH LEVEL MCU.GND_ICSP 151.08,59.36 ; C11.2 68.95,59.87 ; C11.2 70.48,61.3 ; C11.2 70.48,58.68 71.12,58.05 R25.2 69.59,51.89 ; C12.2 83.19,56.53 ; C12.2 84.72,57.96 ; 122.07,19.99 HIGH LEVEL MCU.GND1 126.35,19.99 ; IC4_2551.2 74.98,77.14 ; IC4_2551.2 73.03,78.43 ; IC4_2551.2 73.03,75.85 ; IC4_2551.2 71.32,77.14 71.19,77.01 C16.2 ; 34.24,59.11 LOW LEVEL MCU.GND_ICSP 32.77,60.58 ; 43.81,54.33 IC2_2551.2 43.81,50.42 ; 112.16,19.99 ROUTER MCU.GND1 116.44,19.99 ; X1.1 28.7,15.47 ; X1.1 25.65,18.51 ; X1.1 25.65,12.42 ; X1.1 22.61,15.47 ; 68.18,36.5 ROUTER MCU.GND_2 63.9,36.5 ; C16.2 69.85,78.44 ; C16.2 68.32,77.01 ; C16.2 69.85,75.58 ; J2.8 152.4,9.96 151.89,10.46 147.83,10.46 147.32,9.96 J2.4 ; 101.6,69.04 101.6,70.42 ; IC3_2551.2 157.48,48.61 ; IC3_2551.2 158.77,46.66 ; IC3_2551.2 157.48,44.71 ; IC3_2551.2 156.19,46.66 ; 36.83,71.25 IC1_2515.5 36.83,74.14 ; 167.39,91.23 HIGH LEVEL MCU.GND_B 168.77,89.84 ; 71.12,85.91 ROUTER MCU.GND_A 69.73,87.3 ; 73.59,17.7 U1.20 ; U1.20 75.11,19.22 ; U1.20 72.07,19.22 ; 146.69,67.65 146.69,70.42 ; 53.49,33.71 LOW LEVEL MCU.GND_1 57.77,33.71 ; 167.39,85.91 HIGH LEVEL MCU.GND_A 168.77,87.3 ; 174.61,33.96 HIGH LEVEL MCU.GND_1 170.33,33.96 ; 69.73,89.84 ROUTER MCU.GND_B ; v1(149.22,17.45) v1(156.21,17.45) v1(163.19,17.45) ; J2.18 165.1,9.96 164.59,10.46 160.53,10.46 160.02,9.96 J2.14
BRAKE_ON: length 113.3
  TOP w0.254: v1(77.47,91.11) 77.47,86.67 79.38,84.76 83.19,84.76 83.82,84.12 83.82,52.38 84.45,51.74 88.9,51.74 90.81,49.84 90.81,40.31 91.58,39.54 U2.12 ; LOW LEVEL MCU.39 30.23,91.19 30.79,91.75 v1(69.57,91.75)
  BOTTOM w0.254: v1(69.57,91.75) 76.83,91.75 v1(77.47,91.11)
BRAKE_PWM: length 100.7
  TOP w0.254: v1(13.97,40.64) 13.97,56.82 12.7,58.09 5.33,58.09 4.45,57.2 4.45,52.38 5.33,51.49 LOW LEVEL MCU.2
  BOTTOM w0.254: v1(13.97,40.64) 20.95,40.64 26.36,35.23 53.34,35.23 53.61,34.96 57.52,34.96 57.78,35.23 70.23,35.23 70.48,34.98 70.48,32.48 U1.16
BUZZER: length 122.5
  TOP w0.254: LOW LEVEL MCU.38 28.96,88.31 28.96,92.13 29.21,92.38 71.12,92.38 72.39,91.11 72.39,86.28 73.28,85.39 76.2,85.39 78.11,83.49 82.55,83.49 82.55,51.74 83.82,50.47 87.63,50.47 89.53,48.57 89.53,36.5 91.58,34.46 U2.14
CAN_INT: length 36.5
  TOP w0.254: LOW LEVEL MCU.A10 56.38,71.81 58.42,73.85 58.42,76.5 56.77,78.16 52.45,78.16 51.44,77.14 43.81,77.14 41.91,79.05 IC1_2515.12
  BOTTOM w0.254: ROUTER MCU.A10 65.88,71.9 55.72,71.9 LOW LEVEL MCU.A10
CAN_RXD: length 83.2
  TOP w0.254: IC1_2515.2 29.21,73.97 29.84,74.6 47.62,74.6 50.8,71.42 50.8,63.8 v1(51.44,63.17) ; v1(67.94,63.17) 68.91,63.17 71.12,60.96 71.12,51.1 76.2,46.02 76.2,37.07 U1.14
  BOTTOM w0.254: v1(51.44,63.17) v1(67.94,63.17)
CAN_SS: length 17.2
  TOP w0.254: IC1_2515.16 34.29,82.86 40.01,82.86 41.67,84.52 41.67,88.33 LOW LEVEL MCU.49
CAN_TXD: length 89.9
  TOP w0.254: IC1_2515.1 29.84,75.87 47.62,75.87 51.44,72.06 51.44,64.44 v1(52.07,63.8) ; v1(68.58,63.8) 69.55,63.8 71.75,61.59 71.75,51.74 76.83,46.66 76.83,35.16 U1.15
  BOTTOM w0.254: v1(52.07,63.8) v1(68.58,63.8)
CAN_VREF: length 25.3
  TOP w0.254: IC3_2551.5 150.51,39.04 150.38,38.91 C17.1 149.22,35.81 150.34,34.7 R26.1 ; v1(163.83,34.59) R28.2
  BOTTOM w0.254: IC3_2551.5 152.4,36.75 152.65,36.5 163.58,36.5 163.83,36.25 v1(163.83,34.59)
CANH: length 264.4
  TOP w0.254: IC3_2551.7 157.48,34.59 ; 157.48,34.59 157.48,32.09 157.63,31.94 R29.1 157.63,28.46 157.96,28.13 R7.2 157.96,23.11 ; 157.48,34.59 R28.1 ; v1(70.48,65.71) 70.48,67.61 v1(71.12,68.25) ; 157.96,23.11 157.16,22.31 D4.1 ; 157.96,23.11 158.19,22.88 v1(158.19,13.64) 158.19,9.27 J2.12 ; J1.4 59.05,9.79 59.05,40.69 58.8,40.95 48.26,40.95 46.35,39.04 44.45,39.04 43.97,39.52 R27.1 43.97,42.1 43.81,42.25 43.81,44.76
  BOTTOM w0.254: R31.1 82.67,76.99 82.51,77.14 IC4_2551.7 79.98,77.14 79.34,76.49 79.34,76.47 v1(71.12,68.25) ; 43.81,44.76 43.81,45.42 42.57,46.66 41.91,46.66 36.2,52.38 36.2,59.99 36.83,60.63 46.35,60.63 50.16,64.44 69.22,64.44 v1(70.48,65.71) ; J1.4 62.19,6.66 127,6.66 133.99,13.64 v1(158.19,13.64)
CANL: length 267.4
  TOP w0.254: J1.3 58.42,9.69 58.42,40.06 58.17,40.31 48.9,40.31 46.99,38.41 41.91,38.41 41.12,39.19 R27.2 41.12,42.1 41.27,42.25 41.27,44.76 ; D4.2 155.26,22.31 154.46,23.11 ; 154.46,23.11 R8.2 154.46,28.13 154.79,28.46 R29.2 154.79,31.94 154.94,32.09 154.94,34.59 ; 154.46,23.11 154.23,22.88 v1(154.23,12.37) 154.23,9.27 J2.10 ; 153.19,34.59 154.94,34.59 ; 154.94,34.59 IC3_2551.6 ; v1(69.85,68.25) 69.22,67.61 v1(69.22,65.71)
  BOTTOM w0.254: J1.3 59.32,6.02 127.64,6.02 133.99,12.37 v1(154.23,12.37) ; 41.27,44.76 41.27,46.33 35.56,52.04 35.56,60.38 36.45,61.27 45.72,61.27 49.53,65.08 68.58,65.08 v1(69.22,65.71) ; v1(69.85,68.25) 78.74,77.14 78.74,78.44 79.98,79.68 IC4_2551.6 82.22,79.68 82.37,79.83 R31.2
CD_HL: length 24.4
  TOP w0.254: 159.38,69.04 144.53,83.9 HIGH LEVEL MCU.36
CD_ROUTER: length 20.4
  TOP w0.254: ROUTER MCU.36 93.98,74.12 88.9,69.04
CS_C5_FRONT: length 52.6
  BOTTOM w0.254: ROUTER MCU.37 95.11,90.97 116.82,90.97 118.15,89.64 122.35,89.64 123.69,90.97 143.33,90.97 144.46,89.84 HIGH LEVEL MCU.37
CS_C5_REAR: length 57
  BOTTOM w0.254: ROUTER MCU.38 93.08,85.66 145.36,85.66 147,87.3 HIGH LEVEL MCU.38
CS_GYRO: length 29.6
  TOP w0.254: v1(127.48,83.33) 127.79,83.65 127.79,86.67 128.11,86.98 128.11,88.73 129.22,89.84 HIGH LEVEL MCU.25 ; v1(113.35,83.33) 110.49,86.19 110.49,88.57 ROUTER MCU.25
  BOTTOM w0.254: v1(127.48,83.33) v1(113.35,83.33)
CS_MOUSE: length 62.1
  TOP w0.254: v1(123.83,91.9) 121.56,89.64 118.24,89.64 116.39,91.48 99.1,91.48 97.92,90.31 97.92,88.44 ROUTER MCU.32
  BOTTOM w0.254: HIGH LEVEL MCU.32 140.02,87.3 141.29,88.57 144.86,88.57 145.66,89.37 145.66,90.31 144.23,91.75 123.98,91.75 v1(123.83,91.9)
CS_SD_HL: length 98.7
  TOP w0.254: J2.7 151.13,7.29 151.13,11.73 144.15,18.72 144.15,47.3 156.84,59.99 156.84,69.04 143.51,82.37 143.51,86.85 143.49,86.87 143.49,88.33 HIGH LEVEL MCU.35
CS_SD_ROUTER: length 193.4
  TOP w0.254: 91.44,69.04 95.25,72.85 95.25,88.57 ROUTER MCU.35 99.69,93.02 168.28,93.02 176.53,84.76 176.53,64.44 175.26,63.17 175.26,18.72 170.81,14.28 170.81,5.38 170.18,4.75 168.91,4.75 J2.19
D_36: length 133.9
  TOP w0.254: LOW LEVEL MCU.36 26.42,88.31 26.42,93.4 26.67,93.65 78.49,93.65 80.01,92.13 80.01,85.65 80.26,85.39 83.82,85.39 84.45,84.76 84.45,53.01 85.09,52.38 89.53,52.38 95.25,46.66 95.25,32.69 94.48,31.92 U2.15
DAC_SS: length 53.9
  TOP w0.254: v1(67.31,86.67) 70.48,83.49 74.3,83.49 76.83,80.95 76.83,67.01 75.56,65.74 IC3_4802.2
  BOTTOM w0.254: LOW LEVEL MCU.48 44.23,88.35 65.62,88.35 v1(67.31,86.67)
DACA: length 5.8
  BOTTOM w0.254: R24.1 73.66,52.95 73.03,53.58 IC3_4802.8
DACB: length 5.8
  BOTTOM w0.254: IC3_4802.6 78.11,53.58 77.47,52.95 R22.1
DEBUG_LED: length 7.4
  TOP w0.254: LOW LEVEL MCU.13 12.95,22.28 13.34,21.89 DS1.A
DRDY_C: length 42.4
  TOP w0.254: HIGH LEVEL MCU.26 131.76,87.24 131.76,82.7 130.97,81.9 130.97,78.89 v1(127.95,75.87) ; ROUTER MCU.26 107.79,86.19 v1(107.79,80.47)
  BOTTOM w0.254: v1(127.95,75.87) 112.39,75.87 v1(107.79,80.47)
DRDY_G: length 25
  TOP w0.254: v1(111.6,83.97) 109.86,85.71 109.86,86.67 ROUTER MCU.24 ; v1(128.59,83.97) 129.22,84.6 129.22,87.24 HIGH LEVEL MCU.24
  BOTTOM w0.254: v1(128.59,83.97) 128.46,84.09 111.73,84.09 v1(111.6,83.97)
EBIKECONTRL: length 30.8
  TOP w0.254: v1(62.07,75.23) 62.07,58.25 ROUTER MCU.A4
  BOTTOM w0.254: v1(62.07,75.23) 57.94,79.36 55.69,79.36 LOW LEVEL MCU.A13
EN: length 62.4
  TOP w0.254: v1(125.73,70.79) 135.73,80.79 135.73,88.67 HIGH LEVEL MCU.31 ; v1(102.87,77.14) 102.87,88.57 ROUTER MCU.31
  BOTTOM w0.254: v1(125.73,70.79) 109.22,70.79 v1(102.87,77.14)
ESTOP_INT: length 10.5
  BOTTOM w0.254: LOW LEVEL MCU.A9 55.72,69.36 65.88,69.36 ROUTER MCU.A9
FIX: length 62
  TOP w0.254: v1(136.08,78.6) 136.84,79.36 136.84,86.23 136.91,86.29 HIGH LEVEL MCU.30 ; ROUTER MCU.30 v1(101.6,76.5)
  BOTTOM w0.254: v1(136.08,78.6) 125.73,68.25 109.86,68.25 v1(101.6,76.5)
FWDSW: length 142
  TOP w0.254: U2.16 94.48,29.38 96.52,31.42 96.52,46.66 90.17,53.01 85.72,53.01 85.09,53.65 85.09,92.38 83.19,94.28 24.13,94.28 23.88,94.03 23.88,88.31 LOW LEVEL MCU.34
GPS_RX: length 11
  BOTTOM w0.254: HIGH LEVEL MCU.TX3 120.65,61.9 118.11,64.44 ROUTER MCU.RX3
GPS_TX: length 11
  TOP w0.254: HIGH LEVEL MCU.RX3 120.65,64.44 118.11,61.9 ROUTER MCU.TX3
HALLPHASEA: length 29.5
  TOP w0.254: v1(64.14,75.87) 64.14,61.27 ROUTER MCU.A6
  BOTTOM w0.254: v1(64.14,75.87) 55.63,84.38 LOW LEVEL MCU.A15
HALLPHASEB: length 29.9
  TOP w0.254: v1(63.18,75.23) 63.18,59.68 ROUTER MCU.A5
  BOTTOM w0.254: v1(63.18,75.23) 56.52,81.9 55.69,81.9 LOW LEVEL MCU.A14
HALLPHASEC: length 37
  TOP w0.254: LOW LEVEL MCU.A12 54.87,76.89 53.34,75.35 v1(53.34,56.19)
  BOTTOM w0.254: ROUTER MCU.A3 61.59,51.74 58.05,55.28 53.61,55.28 53.34,55.55 v1(53.34,56.19)
HL-CANRX: length 53
  TOP w0.254: HIGH LEVEL MCU.CANRX 167,82.22 165.1,80.31 165.1,55.55 163.19,53.65 153.03,53.65 152.4,53.01 IC3_2551.4
HL-CANTX: length 51.3
  TOP w0.254: HIGH LEVEL MCU.CANTX 174.62,84.76 175.26,84.12 175.26,65.08 174.62,64.44 167,64.44 166.37,63.8 166.37,55.55 160.02,49.2 IC3_2551.1
I1: length 41.7
  TOP w0.254: v1(112.24,80.47) 110.81,81.9 110.81,83.97 107.95,86.82 107.95,88.57 ROUTER MCU.27 ; HIGH LEVEL MCU.27 130.65,88.67 130.65,82.38 v1(128.11,79.84)
  BOTTOM w0.254: v1(128.11,79.84) 126.68,78.41 112.24,78.41 v1(112.24,80.47)
I2: length 51.3
  TOP w0.254: v1(104.78,80.47) 104.78,86.67 ROUTER MCU.28 ; v1(126.52,73.33) 134.3,81.11 134.3,87.24 HIGH LEVEL MCU.28
  BOTTOM w0.254: v1(126.52,73.33) 107.95,73.33 104.78,76.5 v1(104.78,80.47)
INT1: length 17.5
  TOP w0.254: HIGH LEVEL MCU.23 125.61,90.97 123.69,90.97 121.84,89.13 117.87,89.13 116.02,90.97 112.89,90.97 ROUTER MCU.23
L_SENSE: length 34.3
  TOP w0.254: LOW LEVEL MCU.A2 61.28,54.6 61.28,75.51 62.9,77.14 ROUTER MCU.DAC0
LED: length 53.4
  TOP w0.254: v1(141.99,83.24) HIGH LEVEL MCU.34 ; ROUTER MCU.34 97.79,86.03 v1(97.79,83.81)
  BOTTOM w0.254: v1(97.79,83.81) 98.58,83.01 111.6,83.01 112.39,82.22 140.97,82.22 v1(141.99,83.24)
LL-CANRX: length 59.4
  TOP w0.254: U1.4 81.28,39.66 v1(81.28,43.48)
  BOTTOM w0.254: v1(81.28,43.48) 72.39,43.48 70.48,41.58 62.23,41.58 58.69,45.12 51.7,45.12 49.53,47.3 43.15,47.3 38.73,51.71 IC2_2551.4
LL-CANTX: length 54.6
  TOP w0.254: v1(80.01,44.12) 80.01,38.39 U1.5
  BOTTOM w0.254: v1(80.01,44.12) 71.75,44.12 69.85,42.22 64.14,42.22 58.69,47.66 53.61,47.66 52.07,49.2 52.07,51.1 50.8,52.38 IC2_2551.1
LL_SCK: length 61.5
  TOP w0.254: IC3_4802.3 78.11,66.98 77.47,67.61 77.47,81.58 74.93,84.12 71.15,84.12 67.64,87.63 65.41,87.63 64.14,86.36 52.7,86.36 52.07,85.72 49.33,85.72 LOW LEVEL MCU.52 42.37,81.41 40.46,81.41 IC1_2515.13
MISO: length 14
  TOP w0.254: IC1_2515.15 36.2,82.22 40.64,82.22 LOW LEVEL MCU.50
MISO_HL: length 80.4
  TOP w0.254: 142.49,56.82 142.49,59.77 151.76,69.04 ; 142.49,56.82 136.53,56.82 135.25,55.55 135.25,23.16 JP2.4 146.05,12.37 146.05,7.29 J2.3 ; 142.49,56.82 HIGH LEVEL MCU.MISO_ICSP
MISO_ROUTER: length 138
  TOP w0.254: v1(132.08,59.36) v1(132.08,25.07) ; 96.52,69.04 92.71,65.23 92.71,58.09 ROUTER MCU.MISO_ICSP ; JP2.3 132.08,19.99 132.08,11.1 139.7,3.48 160.02,3.48 J2.15
  BOTTOM w0.254: v1(132.08,25.07) 132.08,23.8 JP2.3 ; ROUTER MCU.MISO_ICSP 96.52,59.36 v1(132.08,59.36)
MOSI: length 72.1
  TOP w0.254: IC1_2515.14 38.33,81.82 42.14,81.82 46.77,86.45 46.77,88.28 LOW LEVEL MCU.51 45.47,90.86 45.72,91.11 65.41,91.11 71.75,84.76 75.56,84.76 78.11,82.22 78.11,69.19 80.64,66.65 IC3_4802.4
MOSI_HL: length 80
  TOP w0.254: 154.31,69.04 147.07,61.8 HIGH LEVEL MCU.MOSI_ICSP 145.8,58.09 145.8,55.3 144.78,54.28 137.79,54.28 136.53,53.01 JP2.2 148.59,12.37 148.59,7.29 J2.5
MOSI_ROUTER: length 143.8
  TOP w0.254: ROUTER MCU.MOSI_ICSP 91.44,66.5 93.98,69.04 ; J2.17 161.93,2.85 139.06,2.85 130.81,11.1 130.81,21.26 JP2.1 v1(133.99,59.99)
  BOTTOM w0.254: v1(133.99,59.99) 99.06,59.99 97.79,61.27 93.34,61.27 ROUTER MCU.MOSI_ICSP
NPD: length 78.6
  TOP w0.254: v1(100.97,66.98) 100.33,67.61 100.33,88.57 ROUTER MCU.33 ; v1(138.27,78.57) 138.27,88.73 139.38,89.84 HIGH LEVEL MCU.33
  BOTTOM w0.254: v1(100.97,66.98) 102.23,65.71 125.41,65.71 v1(138.27,78.57)
OSC1: length 9.4
  TOP w0.254: IC1_2515.8 44.45,67.77 44.43,67.75 Q1.2 44.43,64.37 44.45,64.35 C6.1
OSC2: length 9.4
  TOP w0.254: C5.1 41.91,64.35 41.93,64.37 Q1.1 41.93,67.75 41.91,67.77 IC1_2515.7
PPS: length 50
  TOP w0.254: HIGH LEVEL MCU.29 133.19,88.67 133.19,81.27 v1(131.76,79.84) ; v1(126.36,76.66) 125.71,76 111.19,76 105.41,81.78 105.41,88.57 ROUTER MCU.29
  BOTTOM w0.254: v1(131.76,79.84) 129.54,79.84 v1(126.36,76.66)
PWRIN: length 8.6
  TOP w1.016: D1.A 24.77,22.58 X1.2
R_BRAKE_ON: length 20.9
  BOTTOM w0.254: U2.2 110.99,39.54 111.76,40.31 116.59,40.31 116.84,40.06 116.84,32.94 116.59,32.69 ROUTER MCU.9
R_BRAKE_PWM: length 98.9
  TOP w0.254: v1(117.22,9.2) 117.47,9.45 117.47,51.49 117.22,51.74 ROUTER MCU.2 ; U1.6 83.82,26.72 83.82,11.73 v1(86.36,9.2)
  BOTTOM w0.254: v1(86.36,9.2) v1(117.22,9.2)
R_BUZZER: length 27.5
  TOP w0.254: U2.4 102.87,37.76 v1(102.87,49.2)
  BOTTOM w0.254: ROUTER MCU.3 v1(102.87,49.2)
R_D_36: length 11.5
  BOTTOM w0.254: U2.5 107.95,33.7 107.95,34.45 112.54,39.04 ROUTER MCU.7
R_DACA: length 12.6
  BOTTOM w0.254: R24.2 73.66,47.55 73.41,47.3 72.39,47.3 ; R25.1 71.12,47.55 71.37,47.3 72.39,47.3 ; 72.39,47.3 72.39,46.91 72.14,46.66 ROUTER MCU.A1
R_DACB: length 20.7
  BOTTOM w0.254: ROUTER MCU.A0 66.79,44.12 68.06,45.39 78.49,45.39 78.74,45.64 78.74,47.3 ; 78.74,47.3 77.72,47.3 77.47,47.55 R22.2 ; 78.74,47.3 79.76,47.3 80.01,47.55 R23.1
R_FWDSW: length 10.6
  BOTTOM w0.254: U2.6 112.02,35.23 ROUTER MCU.8
R_REGEN_ACTIVE: length 9.5
  BOTTOM w0.254: ROUTER MCU.11 109.47,27.61 U2.8
R_REVERSE: length 9.5
  BOTTOM w0.254: U2.7 109.47,30.15 ROUTER MCU.10
R_RX1: length 89.4
  TOP w0.254: v1(107.95,15.54) 107.95,67.61 108.58,68.25 108.58,70.65 112.54,74.6 ROUTER MCU.RX1 ; v1(88.27,15.54) 88.27,19.98 U1.9
  BOTTOM w0.254: v1(107.95,15.54) v1(88.27,15.54)
R_RX3: length 60.4
  TOP w0.254: v1(110.49,53.01) 110.49,66.46 113.55,69.52 ROUTER MCU.RX2 ; v1(85.09,45.39) 85.09,38.39 U1.3
  BOTTOM w0.254: v1(110.49,53.01) 85.34,53.01 85.09,52.76 v1(85.09,45.39)
R_SENSE: length 33.3
  TOP w0.254: LOW LEVEL MCU.A3 60.64,56.5 60.64,75.6 64.72,79.68 ROUTER MCU.DAC1
R_STEER_PWM: length 77.7
  TOP w0.254: ROUTER MCU.6 116.2,41.58 116.84,40.95 116.84,10.72 v1(116.59,10.46) ; v1(90.17,10.46) 88.9,11.73 88.9,24.42 U1.7
  BOTTOM w0.254: v1(116.59,10.46) v1(90.17,10.46)
R_TX1: length 93.8
  TOP w0.254: v1(109.22,14.91) 109.22,67.73 113.55,72.06 ROUTER MCU.TX1 ; U1.8 85.09,22.91 v1(85.09,14.91)
  BOTTOM w0.254: v1(109.22,14.91) v1(85.09,14.91)
R_TX3: length 53.5
  TOP w0.254: ROUTER MCU.TX2 113.55,66.98 111.76,65.19 v1(111.76,52.38) ; v1(88.27,45.39) 88.27,40.18 87.62,39.54 U1.2
  BOTTOM w0.254: v1(88.27,45.39) 88.27,51.74 88.9,52.38 v1(111.76,52.38)
R_VOLTAGE_SWITCH: length 20.7
  TOP w0.254: U2.3 104.14,39.02 v1(104.14,46.66)
  BOTTOM w0.254: ROUTER MCU.4 v1(104.14,46.66)
R_WATCHDOG: length 37
  TOP w0.254: v1(101.6,44.12) 101.6,26.32 U2.9
  BOTTOM w0.254: v1(101.6,44.12) ROUTER MCU.5
REGEN_ACTIVE: length 171.6
  TOP w0.254: U2.18 94.48,24.3 99.06,28.88 99.06,46.66 91.44,54.28 87,54.28 86.36,54.91 86.36,82.22 90.17,86.03 90.17,91.11 85.72,95.56 8.89,95.56 8.64,95.3 8.64,88.31 LOW LEVEL MCU.22
REVERSE: length 161.9
  TOP w0.254: LOW LEVEL MCU.24 11.18,88.31 11.18,94.67 11.43,94.92 84.45,94.92 87.63,91.75 87.63,86.67 85.72,84.76 85.72,54.28 86.36,53.65 90.81,53.65 97.79,46.66 97.79,30.15 94.48,26.84 U2.17
RS: length 9.2
  TOP w0.254: IC1_2515.17 29.21,76.76 28.96,76.5 R13.1
RT-CANRX: length 7
  BOTTOM w0.254: ROUTER MCU.CANRX IC4_2551.4
RT-CANTX: length 15.7
  TOP w0.254: IC4_2551.1 70.48,74.6 69.85,75.23 69.85,82.86 67.94,84.76 ROUTER MCU.CANTX
RX0: length 94.5
  TOP w0.254: v1(11.43,28.25) 11.43,53.26 8.12,56.57 LOW LEVEL MCU.RX0
  BOTTOM w0.254: U1.18 69.35,24.3 68.58,25.07 61.59,25.07 61.33,24.8 14.87,24.8 v1(11.43,28.25)
RX3: length 87.2
  TOP w0.254: LOW LEVEL MCU.RX3 13.59,64.19 17.14,60.63 v1(17.14,42.22)
  BOTTOM w0.254: U1.12 70.62,39.54 69.21,40.95 69.21,40.95 61.59,40.95 60.33,42.22 v1(17.14,42.22)
SCK_HL: length 78.5
  TOP w0.254: JP2.6 142.88,13.01 142.88,7.92 J2.1 ; HIGH LEVEL MCU.SCK_ICSP 147.07,54.66 144.78,52.38 139.06,52.38 138.43,51.74 v1(138.43,24.43)
  BOTTOM w0.254: HIGH LEVEL MCU.SCK_ICSP 145.8,58.09 145.8,65.61 149.22,69.04 ; JP2.6 137.62,18.26 137.97,18.26 138.43,18.72 v1(138.43,24.43)
SCK_ROUTER: length 140.7
  TOP w0.254: ROUTER MCU.SCK_ICSP 93.34,54.91 95.25,54.91 97.16,56.82 97.16,67.13 99.06,69.04 ; v1(130.18,25.07) v1(130.18,58.73) ; JP2.5 133.99,11.1 140.97,4.12 158.75,4.12 160.02,5.38 J2.13
  BOTTOM w0.254: v1(130.18,25.07) 130.18,23.16 JP2.5 ; ROUTER MCU.SCK_ICSP 93.34,54.91 95.25,54.91 99.06,58.73 v1(130.18,58.73)
SCL1: length 76.6
  TOP w0.254: R3.2 119.38,32.53 122.24,29.67 122.24,14.34 HIGH LEVEL MCU.SCL1 124.21,8.43 129.16,3.48 v1(130.81,3.48)
  BOTTOM w0.254: J2.9 154.94,4.75 153.67,3.48 v1(130.81,3.48) ; HIGH LEVEL MCU.SCL1 ROUTER MCU.SCL1
SDA1: length 51.6
  TOP w0.254: HIGH LEVEL MCU.SDA1 124.92,14.91 126.11,13.72 126.11,13.64 126.36,13.39 126.36,7.92 127,7.29 v1(130.81,7.29)
  BOTTOM w0.254: HIGH LEVEL MCU.SDA1 121.13,14.91 119.38,16.66 R4.2 117.6,14.91 ROUTER MCU.SDA1 ; v1(130.81,7.29) 156.21,7.29 J2.11
SPEEDOMETER: length 10.5
  BOTTOM w0.254: LOW LEVEL MCU.A11 55.72,74.44 65.88,74.44 ROUTER MCU.A11
SPI_SS: length 93.8
  TOP w0.254: v1(140.18,88.57) 140.81,89.2 140.81,90.27 141.52,90.97 163.71,90.97 HIGH LEVEL MCU.53
  BOTTOM w0.254: v1(140.18,88.57) 74.93,88.57 ROUTER MCU.53
STEER_SERVO_PWM: length 131.2
  TOP w0.254: U1.17 77.47,22.96 v1(77.47,4.75)
  BOTTOM w0.254: v1(77.47,4.75) 10.79,4.75 4.45,11.1 4.45,39.16 6.61,41.33 LOW LEVEL MCU.6
TX0: length 94.1
  TOP w0.254: LOW LEVEL MCU.TX0 8.12,54.03 10.16,51.99 v1(10.16,27.61)
  BOTTOM w0.254: U1.19 69.35,21.76 68.58,22.53 61.79,22.53 61.54,22.28 15.49,22.28 v1(10.16,27.61)
TX3: length 87.6
  TOP w0.254: v1(15.24,41.58) 15.24,60.63 14.22,61.65 LOW LEVEL MCU.TX3
  BOTTOM w0.254: v1(15.24,41.58) 59.69,41.58 60.96,40.31 67.94,40.31 71.25,37 U1.13
VOLTAGE_SWITCH: length 120.1
  TOP w0.254: LOW LEVEL MCU.37 27.69,92.76 27.94,93.02 73.41,93.02 74.93,91.49 74.93,86.28 75.18,86.03 76.83,86.03 78.74,84.12 82.93,84.12 83.19,83.87 83.19,51.99 84.07,51.1 88.27,51.1 90.17,49.2 90.17,38.41 91.58,37 U2.13
WATCHDOG: length 142.6
  TOP w0.254: U2.19 91.5,19.99 91.5,8.96 v1(87.63,5.08)
  BOTTOM w0.254: LOW LEVEL MCU.5 6.61,43.87 3.17,40.43 3.17,10.46 10.16,3.48 86.03,3.48 v1(87.63,5.08)
WHEELROTATION: length 82.2
  TOP w0.254: HIGH LEVEL MCU.22 126.75,85.14 v1(123.19,81.58)
  BOTTOM w0.254: v1(123.19,81.58) 98.42,81.58 86.36,69.52 86.36,67.23 86.11,66.98 ROUTER MCU.A8 60.01,66.98 59.75,66.73 LOW LEVEL MCU.A8
N00469: length 7.2
  TOP w0.254: R13.2 18.41,76.5 ; 18.41,76.5 C14.1 ; 18.41,76.5 R14.2
N00471: length 3
  TOP w0.254: DS2.K R12.2
N00472: length 2.4
  TOP w0.254: DS1.K 13.34,15.7
N35866: length 3.2
  TOP w0.254: 46.35,44.76 48.22,44.76 48.38,44.6 R9.1
N35982: length 5.7
  TOP w0.254: 163.19,23.3 163.19,26.34 162.56,26.98 R7.1
N35986: length 5.7
  TOP w0.254: 149.22,23.3 149.22,26.34 149.86,26.98 R8.1
N38622: length 3.2
  TOP w0.254: IC3_2551.8 161.89,39.04 162.04,38.89 R30.1
N38835: length 5.2
  BOTTOM w0.254: R32.1 83.82,73.97 83.19,74.6 IC4_2551.8

## Copper pours and planes (outline as drawn; the poured copper is in the pictures)
12V0 on TOP (solid shape): 25.4,32.38 37.47,32.38 37.47,31.11 35.56,29.21 33.02,29.21 32.38,29.84 27.3,29.84 26.67,29.21 22.23,29.21 22.23,34.92 19.05,34.92 19.05,37.47 25.4,37.47
GND on BOTTOM: 0.5,0.5 0.5,99.5 179.5,99.5 179.5,0.5 ; 39 cut-outs
PWRIN on TOP (solid shape): 26.67,21.59 23.06,17.98 23.06,17.47 20.63,17.47 19.05,19.05 19.05,25.4 19.68,26.04 26.67,26.04
